# Altium PCB valdisPCB.PcbDoc
Units mm, origin at the board's own origin, x right, y up, seen from the top; angles counter-clockwise.
Board outline 59.82 x 60 mm, 2 copper layers (Top Layer, Bottom Layer); 80 components, 68 nets, 288 pads, 0 vias.
Unrouted connection lines stored in the file: 192.
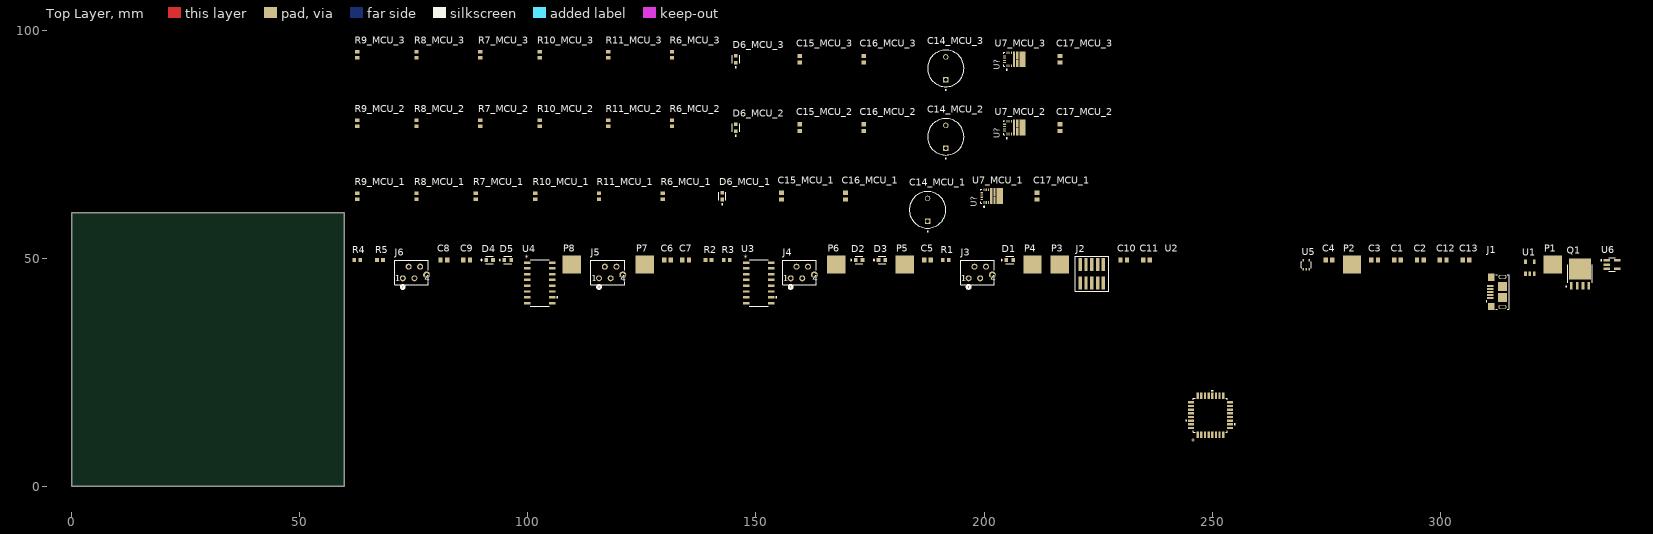
[diagram p0: Top Layer view]
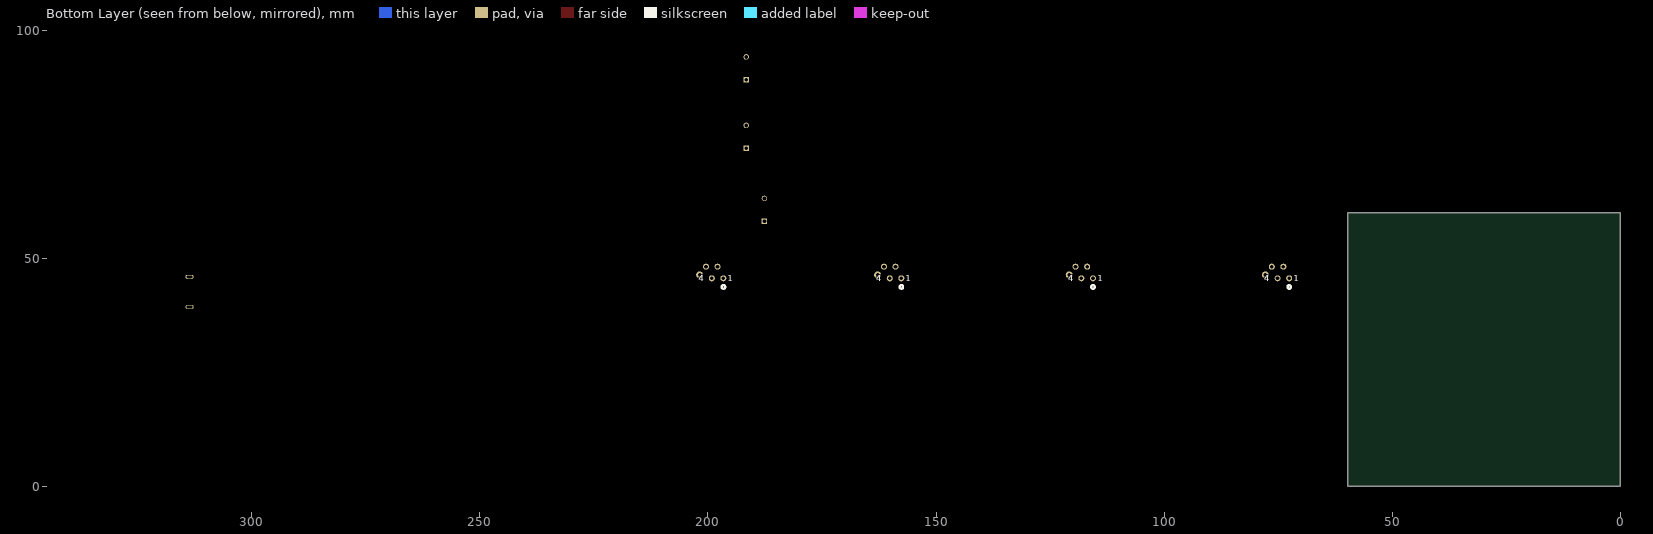
[diagram p1: Bottom Layer view, seen from below]

## Layer stack, top to bottom
Top Solder: solder mask 0.0102, Solder Resist, Dk 3.5
Top Layer: signal copper 0.0356
Dielectric 1: dielectric 0.32, FR-4, Dk 4.8
Bottom Layer: signal copper 0.0356
Bottom Solder: solder mask 0.0102, Solder Resist, Dk 3.5

## Board outline
0,0 59.817,0 59.817,60 0,60

## Design rules (kind name [scope] priority, off if disabled: settings)
Clearance [All] p1: gap=0.254 ignorepadtopadclearanceinfootprint=FALSE except(0: Arc-Hole Track-Hole SMDPad-Hole THPad-Hole Via-Hole Fill-Hole Poly-Hole Region-Hole Text-Hole)
PolygonConnect [All] p1: connectstyle=Relief reliefconductorwidth=0.254 reliefentries=4 polygonreliefangle="90 Angle" airgapwidth=0.254
RoomDefinition MCU_3 [InComponentClass('MCU_3')] p1: confinementstyle=ConfineIn formatcopy=TRUE lockcomponents=FALSE outline 61.6,85.6 229.6,85.6 229.6,99.6 61.6,99.6
RoomDefinition MCU_2 [InComponentClass('MCU_2')] p2: confinementstyle=ConfineIn formatcopy=TRUE lockcomponents=FALSE outline 61.6,70.6 229.6,70.6 229.6,84.6 61.6,84.6
RoomDefinition MCU_1 [InComponentClass('MCU_1')] p3: confinementstyle=ConfineIn formatcopy=TRUE lockcomponents=FALSE outline 61.6,54.6 223.6,54.6 223.6,68.6 61.6,68.6
RoomDefinition mainboard_valdis [InComponentClass('mainboard_valdis')] p4: confinementstyle=ConfineIn formatcopy=TRUE lockcomponents=FALSE outline 60.6,2.6 340.6,2.6 340.6,53.6 60.6,53.6
RoutingVias [All] p1: holewidth=0.711 width=1.27 viastyle="Through Hole" minholewidth=0.711 minwidth=1.27 maxholewidth=0.711 maxwidth=1.27
SolderMaskExpansion [All] p1: expansion=0.102 istentingtop=FALSE
Width [All] p1: maxlimit=0.254 minlimit=0.254 preferedwidth=0.254
30 further rules are at their usual default settings.

## Classes and differential pairs
channel class mcu_valdis: MCU_1 MCU_2 MCU_3
component class MCU_3: C14_MCU_3 C15_MCU_3 C16_MCU_3 C17_MCU_3 D6_MCU_3 R6_MCU_3 R7_MCU_3 R8_MCU_3 R9_MCU_3 R10_MCU_3 R11_MCU_3 U7_MCU_3
component class MCU_2: C14_MCU_2 C15_MCU_2 C16_MCU_2 C17_MCU_2 D6_MCU_2 R6_MCU_2 R7_MCU_2 R8_MCU_2 R9_MCU_2 R10_MCU_2 R11_MCU_2 U7_MCU_2
component class MCU_1: C14_MCU_1 C15_MCU_1 C16_MCU_1 C17_MCU_1 D6_MCU_1 R6_MCU_1 R7_MCU_1 R8_MCU_1 R9_MCU_1 R10_MCU_1 R11_MCU_1 U7_MCU_1
component class mainboard_valdis: C1 C2 C3 C4 C5 C6 C7 C8 C9 C10 C11 C12 C13 D1 D2 D3 D4 D5 J1 J2 J3 J4 J5 J6 P1 P2 P3 P4 P5 P6 P7 P8 Q1 R1 R2 R3 R4 R5 U1 U2 U3 U4 U5 U6

## Components (designator, comment, footprint, x,y, rotation, side; value= is the part's Value field where it differs from the comment)
C1 "4.7uF" CAPC1608X90X35ML10T15 290.6,49.6 r0 top
C2 "100nF" CAPC1608X90X35ML10T15 295.6,49.6 r0 top
C3 "100nF" CAPC1608X90X35ML10T15 285.6,49.6 r0 top
C4 "100nF" CAPC1608X90X35ML10T15 275.6,49.6 r0 top
C5 "100nF" CAPC1608X90X35ML10T15 187.6,49.6 r0 top
C6 "100nF" CAPC1608X90X35ML10T15 130.6,49.6 r0 top
C7 "100nF" CAPC1608X90X35ML10T15 134.6,49.6 r0 top
C8 "100nF" CAPC1608X90X35ML10T15 81.6,49.6 r0 top
C9 "100nF" CAPC1608X90X35ML10T15 86.6,49.6 r0 top
C10 "1uF" CAPC1608X90X35ML10T15 230.6,49.6 r0 top
C11 "1uF" CAPC1608X90X35ML10T15 235.6,49.6 r0 top
C12 "1uF" CAPC1608X90X35ML10T15 300.6,49.6 r0 top
C13 "1uF" CAPC1608X90X35ML10T15 305.6,49.6 r0 top
C14_MCU_1 "470uF" CAPPRD500W60D800H1500 187.6,60.6 r90 top (schematic designator C14)
C14_MCU_2 "470uF" CAPPRD500W60D800H1500 191.6,76.6 r90 top (schematic designator C14)
C14_MCU_3 "470uF" CAPPRD500W60D800H1500 191.6,91.6 r90 top (schematic designator C14)
C15_MCU_1 "4.7uF" CAPC1608X90X35ML10T15 155.6,63.6 r90 top (schematic designator C15)
C15_MCU_2 "4.7uF" CAPC1608X90X35ML10T15 159.6,78.6 r90 top (schematic designator C15)
C15_MCU_3 "4.7uF" CAPC1608X90X35ML10T15 159.6,93.6 r90 top (schematic designator C15)
C16_MCU_1 "100nF" CAPC1608X90X35ML10T15 169.6,63.6 r90 top (schematic designator C16)
C16_MCU_2 "100nF" CAPC1608X90X35ML10T15 173.6,78.6 r90 top (schematic designator C16)
C16_MCU_3 "100nF" CAPC1608X90X35ML10T15 173.6,93.6 r90 top (schematic designator C16)
C17_MCU_1 "100nF" CAPC1608X90X35ML10T15 211.6,63.6 r90 top (schematic designator C17)
C17_MCU_2 "100nF" CAPC1608X90X35ML10T15 216.6,78.6 r90 top (schematic designator C17)
C17_MCU_3 "100nF" CAPC1608X90X35ML10T15 216.6,93.6 r90 top (schematic designator C17)
D1 "LTST-C191TBKT" FP-LTST-C191TBKT-MFG 205.6,49.6 r0 top
D2 "LTST-C191TBKT" FP-LTST-C191TBKT-MFG 172.6,49.6 r0 top
D3 "LTST-C191TBKT" FP-LTST-C191TBKT-MFG 177.6,49.6 r0 top
D4 "LTST-C191TBKT" FP-LTST-C191TBKT-MFG 91.6,49.6 r0 top
D5 "LTST-C191TBKT" FP-LTST-C191TBKT-MFG 95.6,49.6 r0 top
D6_MCU_1 "LTST-C191TBKT" FP-LTST-C191TBKT-MFG 142.6,63.6 r90 top (schematic designator D6)
D6_MCU_2 "LTST-C191TBKT" FP-LTST-C191TBKT-MFG 145.6,78.6 r90 top (schematic designator D6)
D6_MCU_3 "LTST-C191TBKT" FP-LTST-C191TBKT-MFG 145.6,93.6 r90 top (schematic designator D6)
J1 "10118193-0001LF" FCI_10118193-0001LF 313.6,42.6 r90 top
J2 "FTSH-105-01-L-DV-K" FTSH-105-01-XXX-DV-K 223.6,46.6 r0 top
J3 "215079-4" CONN_215079-4_TYC 196.6,45.6 r0 top
J4 "215079-4" CONN_215079-4_TYC 157.6,45.6 r0 top
J5 "215079-4" CONN_215079-4_TYC 115.6,45.6 r0 top
J6 "215079-4" CONN_215079-4_TYC 72.6,45.6 r0 top
P1 "BAT+" PCBComponent_1 324.6,48.6 r0 top
P2 "BAT-" PCBComponent_1 280.6,48.6 r0 top
P3 "M1+" PCBComponent_1 216.6,48.6 r0 top
P4 "M1-" PCBComponent_1 210.6,48.6 r0 top
P5 "M2+" PCBComponent_1 182.6,48.6 r0 top
P6 "M2-" PCBComponent_1 167.6,48.6 r0 top
P7 "M3+" PCBComponent_1 125.6,48.6 r0 top
P8 "M3-" PCBComponent_1 109.6,48.6 r0 top
Q1 "BUK6Y10-30PX" TO127P600X120-5N 330.6,46.6 r0 top
R1 "1K" RESC1609X50X30NL8T20 191.6,49.6 r0 top
R2 "1K" RESC1609X50X30NL8T20 139.6,49.6 r0 top
R3 "1K" RESC1609X50X30NL8T20 143.6,49.6 r0 top
R4 "1K" RESC1609X50X30NL8T20 62.6,49.6 r0 top
R5 "1K" RESC1609X50X30NL8T20 67.6,49.6 r0 top
R6_MCU_1 "1K" RESC1609X50X30NL8T20 129.6,63.6 r90 top (schematic designator R6)
R6_MCU_2 "1K" RESC1609X50X30NL8T20 131.6,79.6 r90 top (schematic designator R6)
R6_MCU_3 "1K" RESC1609X50X30NL8T20 131.6,94.6 r90 top (schematic designator R6)
R7_MCU_1 "47K" RESC1609X50X30NL8T20 88.6,63.6 r90 top (schematic designator R7)
R7_MCU_2 "47K" RESC1609X50X30NL8T20 89.6,79.6 r90 top (schematic designator R7)
R7_MCU_3 "47K" RESC1609X50X30NL8T20 89.6,94.6 r90 top (schematic designator R7)
R8_MCU_1 "0" RESC1609X50X30NL8T20 75.6,63.6 r90 top (schematic designator R8)
R8_MCU_2 "0" RESC1609X50X30NL8T20 75.6,79.6 r90 top (schematic designator R8)
R8_MCU_3 "0" RESC1609X50X30NL8T20 75.6,94.6 r90 top (schematic designator R8)
R9_MCU_1 "0" RESC1609X50X30NL8T20 62.6,63.6 r90 top (schematic designator R9)
R9_MCU_2 "0" RESC1609X50X30NL8T20 62.6,79.6 r90 top (schematic designator R9)
R9_MCU_3 "0" RESC1609X50X30NL8T20 62.6,94.6 r90 top (schematic designator R9)
R10_MCU_1 "0" RESC1609X50X30NL8T20 101.6,63.6 r90 top (schematic designator R10)
R10_MCU_2 "0" RESC1609X50X30NL8T20 102.6,79.6 r90 top (schematic designator R10)
R10_MCU_3 "0" RESC1609X50X30NL8T20 102.6,94.6 r90 top (schematic designator R10)
R11_MCU_1 "2K" RESC1609X50X30NL8T20 115.6,63.6 r90 top (schematic designator R11)
R11_MCU_2 "2K" RESC1609X50X30NL8T20 117.6,79.6 r90 top (schematic designator R11)
R11_MCU_3 "2K" RESC1609X50X30NL8T20 117.6,94.6 r90 top (schematic designator R11)
U1 "CM1223" SOT23-5 319.6,46.6 r0 top
U2 "STM32G441KBT3" LQFP32_7X7_STM 249.6,15.6 r90 top
U3 "MAX14930DASE+" 21-0041_S16+1_MXM 150.6,44.6 r0 top
U4 "MAX14930DASE+" 21-0041_S16+1_MXM 102.6,44.6 r0 top
U5 "NCV8730ASN500T1G" TSSOP5 270.6,48.6 r0 top
U6 "NCP164CSN330T1G" SOP95P275X110-5N 337.6,48.6 r0 top
U7_MCU_1 "PDRV8243HRXYQ1" RXY0014A-MFG 201.6,63.6 r90 top (schematic designator U7)
U7_MCU_2 "PDRV8243HRXYQ1" RXY0014A-MFG 206.6,78.6 r90 top (schematic designator U7)
U7_MCU_3 "PDRV8243HRXYQ1" RXY0014A-MFG 206.6,93.6 r90 top (schematic designator U7)

## Footprints (in the part's own frame and the unit in brackets; to place one, negate y for a bottom-side part, rotate by r counter-clockwise, add the part's x,y. Pads: shape width x height; smd on the part's side, far side on the other; paste and mask are expansions set on the pad)
21-0041_S16+1_MXM [mm]
  rect 1.456x0.533 smd paste+0 mask+0: 1(-2.722,4.445) 2(-2.722,3.175) 3(-2.722,1.905) 4(-2.722,0.635) 5(-2.722,-0.635) 6(-2.722,-1.905) 7(-2.722,-3.175) 8(-2.722,-4.445) 9(2.722,-4.445) 10(2.722,-3.175) 11(2.722,-1.905) 12(2.722,-0.635) 13(2.722,0.635) 14(2.722,1.905) 15(2.722,3.175) 16(2.722,4.445)
  silkscreen extent -2.12,-5.08 3.96,5.08, body extent -3.1,-4.95 3.1,4.95, height 1.76
CAPC1608X90X35ML10T15 [mm] "Chip Capacitor, 2-Leads, Body 1.7x0.9mm, IPC Low Density"
  rect 0.95x1.05 smd: 1(-0.725,0) 2(0.725,0)
  body extent -0.85,-0.45 0.85,0.45, height 0.9
CAPPRD500W60D800H1500 [mm]
  round 1.2 hole 0.85: N(2.5,0)
  rect 1.2x1.2 hole 0.85: P(-2.5,0)
  silkscreen extent -4.85,-4 4,4, body extent -4,-4 4,4, height 15
CONN_215079-4_TYC [mil]
  round 52 hole 32: 1(0,0) 2(50,100) 3(100,0) 4(150,100)
  round 60 hole 30 unplated: 5(205,29)
  silkscreen extent -70,-90 220,155, body extent 0,0 10,10, height 10
FCI_10118193-0001LF [mm]
  rect 0.4x1.35 smd: 1(-1.3,2.675) 2(-0.65,2.675) 3(0,2.675) 4(0.65,2.675) 5(1.3,2.675)
  rect 1.6x1.4 smd: S1(-3.2,2.45) S2(3.2,2.45)
  rect 1.9x1.9 smd: S3(1.2,0) S4(-1.2,0)
  oval 0.9x1.8 hole 0.5 slot 1.2 at 90 deg: S5(-3.3,0) S6(3.3,0)
  silkscreen extent -3.8,-1.45 3.8,3.6
FP-LTST-C191TBKT-MFG [mm]
  rect 0.8x0.8 smd paste+0 mask+0: 1(-0.75,0) 2(0.75,0)
  silkscreen extent -1.87,-0.8 0.85,0.8, body extent -1.25,-0.55 1.25,0.55, height 0.25
FTSH-105-01-XXX-DV-K [mil]
  rect 29x110 smd mask+2: 1(-100,-80) 2(-100,80) 3(-50,-80) 4(-50,80) 5(0,-80) 6(0,80) 7(50,-80) 8(50,80) 9(100,-80) 10(100,80)
  silkscreen extent -145,-150 145,150
LQFP32_7X7_STM [mm]
  rect 1.359x0.501 smd paste+0 mask+0: 1(-4.274,2.8) 2(-4.274,2) 3(-4.274,1.2) 4(-4.274,0.4) 5(-4.274,-0.4) 6(-4.274,-1.2) 7(-4.274,-2) 8(-4.274,-2.8) 17(4.274,-2.8) 18(4.274,-2) 19(4.274,-1.2) 20(4.274,-0.4) 21(4.274,0.4) 22(4.274,1.2) 23(4.274,2) 24(4.274,2.8)
  rect 0.501x1.359 smd paste+0 mask+0: 9(-2.8,-4.274) 10(-2,-4.274) 11(-1.2,-4.274) 12(-0.4,-4.274) 13(0.4,-4.274) 14(1.2,-4.274) 15(2,-4.274) 16(2.8,-4.274) 25(2.8,4.274) 26(2,4.274) 27(1.2,4.274) 28(0.4,4.274) 29(-0.4,4.274) 30(-1.2,4.274) 31(-2,4.274) 32(-2.8,4.274)
  silkscreen extent -3.72,-5.46 5.46,5.46, body extent 0,0 0.25,0.25, height 0.25
PCBComponent_1 [mm]
  rect 4x4 smd: 1(0,0)
RESC1609X50X30NL8T20 [mm] "Chip Resistor, 2-Leads, Body 1.65x0.95mm, IPC Medium Density"
  rect 0.8x0.95 smd: 1(-0.65,0) 2(0.65,0)
  body extent -0.82,-0.48 0.82,0.48, height 0.5
RXY0014A-MFG [mm]
  rect 0.6x0.25 smd paste+0 mask-0.292: 1(-1.4,1.625) 2(-1.4,1.125) 3(-1.4,0.625) 8(1.4,0.625) 9(1.4,1.125) 10(1.4,1.625)
  rect 3.5x0.5 smd paste-1.737 mask-1.74: 4(0,0.05)
  rect 1.675x0.5 smd paste-0.825 mask-0.826: 5(-0.913,-0.65) 7(0.913,-0.65)
  rect 3.5x1.4 smd paste-1.737 mask-1.74: 6(0,-1.8)
  rect 0.25x0.6 smd paste+0 mask-0.292: 11(0.75,2.15) 12(0.25,2.15) 13(-0.25,2.15) 14(-0.75,2.15)
  silkscreen extent -2.45,1.5 1.55,2.3, body extent 0,0 0.25,0.25, height 0.25
SOP95P275X110-5N [mm]
  rect 1.42x0.58 smd: 1(-1.145,0.95) 2(-1.145,0) 3(-1.145,-0.95) 4(1.145,-0.95) 5(1.145,0.95)
  silkscreen extent -2.46,-1.5 0.75,1.5
SOT23-5 [mm] "SOT143-4 as used in SP0503BAHTG"
  round 0.4 on Top Overlay: 1(-1.7,0)
  rect 0.6x1 smd: 1(-0.95,0) 2(0,0) 3(0.95,0) 4(0.95,2.6) 5(-0.95,2.6)
  body extent -1.46,0.13 1.46,2.47, height 1
TO127P600X120-5N [mm]
  rect 0.6x1.62 smd: 1(-1.905,-2.65) 2(-0.635,-2.65) 3(0.635,-2.65) 4(1.905,-2.65)
  rect 4.8x4.58 smd paste-3: 5(0,1.06)
  silkscreen extent -3.1,-2.9 2.72,1.97
TSSOP5 [mm]
  rect 0.35x0.55 smd: 1(-0.65,-1.04) 2(0,-1.04) 3(0.65,-1.04) 4(0.65,0.95) 5(-0.65,0.94)
  silkscreen extent -1.1,-0.7 1.1,0.6

## Part data
C1 C2 C3 C4 C5 C6 C7 C8 C9 C10 C11 C12 C13 C15_MCU_1 C15_MCU_2 C15_MCU_3 C16_MCU_1 C16_MCU_2 C16_MCU_3 C17_MCU_1 C17_MCU_2 C17_MCU_3: library part CMP-2000-04945-1, "Chip Capacitor, 22 pF, +/- 5%, 50 V, -55 to 125 degC, 0603 (1608 Metric), RoHS, Tape and Reel", Capacitance=22pF, Case Size/Dimension=0603, Dielectric=C0G, Manufacturer=Murata, Package Description="2-Pin Surface Mount Device, Body 1.6 x 0.8 mm", Package Reference=603, Rated Voltage=50V, Tolerance (%)=±5%, Datasheet URL=https://datasheet.ciiva.com/11786/0900766b807a1cab-11786398.pdf, Datasheet Version=Jul-06, Manufacturer URL=http://www.murata.com/
C14_MCU_1 C14_MCU_2 C14_MCU_3: library part EEUFR1E471YB, "470F 25V Aluminum Electrolytic Capacitors Radial, Can 8000 Hrs @ 105C", Package="RADIAL-2 Panasonic", Availability="In Stock", Check_prices=https://www.snapeda.com/parts/EEUFR1E471YB/Panasonic/view-part/5797024/?ref=eda, MF=Panasonic, MP=EEUFR1E471YB, Price=None, SnapEDA_Link=https://www.snapeda.com/parts/EEUFR1E471YB/Panasonic/view-part/5797024/?ref=snap
D1 D2 D3 D4 D5 D6_MCU_1 D6_MCU_2 D6_MCU_3: library part CMP-22017-000008-1, "LED BLUE CLEAR CHIP SMD", Case Code (Imperial)=0603, Case Code (Metric)=1608, Color=Blue, Forward Current=20mA, Forward Voltage=3.8V, Lens Color=Colorless, Max Operating Temperature=80°C, Max Power Dissipation=75mW, Min Operating Temperature=-20°C, Package Quantity=1, Power Dissipation=76mW, Reverse Voltage=5V, Case/Package=0603, Depth=1.6mm, Dominant Wavelength=475nm, Height=0.55mm, Illumination Color=Blue, Lead Free="Lead Free", Length=0.8mm, Lens Style=Diffused, Lens Transparency=Clear, Luminous Intensity=180mcd, Mount="Surface Mount", Number of Elements=1, Number of LEDs=1, Number of Pins=2, Packaging="Tape and Reel", Radiation Hardening=No, Test Current=20mA, Viewing Angle=130°, Wavelength=468nm, Width=0.8mm
J1: "USB - micro B USB 2.0 Receptacle Connector 5 Position Surface Mount, Right Angle; Through Hole", Package=None, Availability=Unavailable, MF="Amphenol ICC", MP=10118193-0001LF, Price=None, SnapEDA_Link=https://www.snapeda.com/parts/10118193-0001LF/Amphenol%20FCI/view-part/2758989/?ref=snap
J3 J4 J5 J6: "No Description Available", Mfr_Name="TE Connectivity", Copyright="Copyright (C) 2022 Ultra Librarian. All rights reserved.", Manufacturer_Part_Number=215079-4, RefDes=RefDes, Type=DEV
P1 P2 P3 P4 P5 P6 P7 P8: library part Pad4x4
R1 R2 R3 R4 R5 R6_MCU_1 R6_MCU_2 R6_MCU_3 R7_MCU_1 R7_MCU_2 R7_MCU_3 R8_MCU_1 R8_MCU_2 R8_MCU_3 R9_MCU_1 R9_MCU_2 R9_MCU_3 R10_MCU_1 R10_MCU_2 R10_MCU_3 R11_MCU_1 R11_MCU_2 R11_MCU_3: library part CMP-2000-03816-5, "Chip Resistor, 0 Ohm, Jumper, 100 mW, -55 to 155 degC, 0603 (1608 Metric), RoHS, Tape and Reel", Manufacturer="Vishay Semiconductor", Max Operating Temperature="155 degC", Min Operating Temperature="-55 degC", Package Quantity=5000, Voltage Rating="75 V", ComponentLink1Description="Manufacturer URL", ComponentLink1URL=http://www.vishay.com/, ComponentLink2Description=Datasheet, ComponentLink2URL=http://www.vishay.com/docs/20035/dcrcwe3.pdf, DatasheetVersion=06/2012, Height="0.45 mm", Length="1.55 mm", Mount="Surface Mount", Mounting Technology="Surface Mount", PackageDescription="2-Pin Surface Mount Device, Body 1.575 x 0.85 mm", PackageReference=0603, Packaging="Tape and Reel", Pins=2, REACH SVHC=Unknown, RoHSCompliant=true
U2: "No Description Available", Built_By=EMA_Cory, Copyright="Copyright (C) 2018 Accelerated Designs. All rights reserved", Datasheet=https://www.st.com/resource/en/datasheet/stm32g441kb.pdf, Manufacturer_Part_Number=STM32G441KBT3, RefDes=RefDes, SourceLibrary=Add_to_database_2020-11-05, Type=DEV, Vendor=STMicroelectronics
U7_MCU_1 U7_MCU_2 U7_MCU_3: "No Description Available", Mfr_Name="Texas Instruments", Copyright="Copyright (C) 2022 Ultra Librarian. All rights reserved.", Manufacturer_Part_Number=PDRV8243HRXYQ1, RefDes=RefDes, Type=DEV

## Nets (pads, with @x,y where several pads share a name; then routed paths per layer and width w, separated by ;. In a path a pad name is that pad's centre, name@x,y a point inside that pad or via, vN(x,y) a via of type N, cw(c..) or ccw(c..) an arc to the next point about the centre after c; other vN are vias at no path point)
+3.3V: C6.2 C8.2 C13.2 D2.2 J2.1 J3.2 J4.2 J5.2 U3.1 U4.1 U6.5
+5_MCU_1: C7.2 C9.2 C11.2 C17_MCU_1.2 C17_MCU_2.2 C17_MCU_3.2 D5.2 R6_MCU_1.2 R6_MCU_2.2 R6_MCU_3.2 U3.16 U4.16 U5.5
+5VA: C12.2 D4.2 J1.1 U1.5 U6.1 U6.3
+16V: C10.2 C14_MCU_1.P C14_MCU_2.P C14_MCU_3.P C15_MCU_1.2 C15_MCU_2.2 C15_MCU_3.2 C16_MCU_1.2 C16_MCU_2.2 C16_MCU_3.2 D3.2 Q1.3 U5.1 U5.3 U7_MCU_1.4 U7_MCU_2.4 U7_MCU_3.4
GND: C1.1 C2.1 C3.1 C4.1 C5.1 C6.1 C8.1 C12.1 C13.1 J1.5 J1.S1 J1.S2 J1.S3 J1.S4 J1.S5 J1.S6 J2.3 J2.5 J2.9 R1.1 R2.1 R4.1 U1.2 U2.14 U2.16 U2.32 U3.2 U3.8 U4.2 U4.8 U6.2
GNDB: C7.1 C9.1 C10.1 C11.1 C14_MCU_1.N C14_MCU_2.N C14_MCU_3.N C15_MCU_1.1 C15_MCU_2.1 C15_MCU_3.1 C16_MCU_1.1 C16_MCU_2.1 C16_MCU_3.1 C17_MCU_1.1 C17_MCU_2.1 C17_MCU_3.1 J3.1 J4.1 J5.1 J6.1 R3.1 R5.1 R7_MCU_1.1 R7_MCU_2.1 R7_MCU_3.1 R8_MCU_1.1 R8_MCU_2.1 R8_MCU_3.1 R9_MCU_1.1 R9_MCU_2.1 R9_MCU_3.1 R10_MCU_1.1 R10_MCU_2.1 R10_MCU_3.1 R11_MCU_1.1 R11_MCU_2.1 R11_MCU_3.1 U3.9 U3.15 U4.9 U4.15 U5.2 U7_MCU_1.6 U7_MCU_1.8 U7_MCU_2.6 U7_MCU_2.8 U7_MCU_3.6 U7_MCU_3.8
M1_DIR_A: U3.14 U7_MCU_1.9
M1_DIR_B: U3.13 U7_MCU_1.10
M1_ENC_A: J3.3 U2.18
M1_ENC_B: J3.4 U2.19
M1_PWM_A: U2.5 U3.3
M1_PWM_B: U2.10 U3.4
M2_DIR_A: U3.12 U7_MCU_2.9
M2_DIR_B: U3.11 U7_MCU_2.10
M2_ENC_A: J4.3 U2.27
M2_ENC_B: J4.4 U2.28
M2_PWM_A: U2.6 U3.5
M2_PWM_B: U2.11 U3.6
M3_DIR_A: U4.14 U7_MCU_3.9
M3_DIR_B: U4.13 U7_MCU_3.10
M3_ENC_A: J5.3 U2.30
M3_ENC_B: J5.4 U2.29
M3_PWM_A: U2.7 U4.3
M3_PWM_B: U2.12 U4.4
NetC1_2: C1.2 C2.2 C3.2 C4.2 U2.1 U2.15 U2.17
NetD1_1: D1.1 R1.2
NetD1_2: D1.2 U2.2
NetD2_1: D2.1 R2.2
NetD3_1: D3.1 R3.2
NetD4_1: D4.1 R4.2
NetD5_1: D5.1 R5.2
NetD6_MCU_1_1: D6_MCU_1.1 U7_MCU_1.1
NetD6_MCU_1_2: D6_MCU_1.2 R6_MCU_1.1
NetD6_MCU_2_1: D6_MCU_2.1 U7_MCU_2.1
NetD6_MCU_2_2: D6_MCU_2.2 R6_MCU_2.1
NetD6_MCU_3_1: D6_MCU_3.1 U7_MCU_3.1
NetD6_MCU_3_2: D6_MCU_3.2 R6_MCU_3.1
NetP1_1: P1.1 Q1.1
NetP2_1: P2.1 Q1.2
NetP3_1: P3.1 U7_MCU_1.5
NetP4_1: P4.1 U7_MCU_1.7
NetP5_1: P5.1 U7_MCU_2.5
NetP6_1: P6.1 U7_MCU_2.7
NetP7_1: P7.1 U7_MCU_3.5
NetP8_1: P8.1 U7_MCU_3.7
NetR7_MCU_1_2: R7_MCU_1.2 U7_MCU_1.13
NetR7_MCU_2_2: R7_MCU_2.2 U7_MCU_2.13
NetR7_MCU_3_2: R7_MCU_3.2 U7_MCU_3.13
NetR8_MCU_1_2: R8_MCU_1.2 U7_MCU_1.12
NetR8_MCU_2_2: R8_MCU_2.2 U7_MCU_2.12
NetR8_MCU_3_2: R8_MCU_3.2 U7_MCU_3.12
NetR9_MCU_1_2: R9_MCU_1.2 U7_MCU_1.11
NetR9_MCU_2_2: R9_MCU_2.2 U7_MCU_2.11
NetR9_MCU_3_2: R9_MCU_3.2 U7_MCU_3.11
NetR10_MCU_1_2: R10_MCU_1.2 U7_MCU_1.14
NetR10_MCU_2_2: R10_MCU_2.2 U7_MCU_2.14
NetR10_MCU_3_2: R10_MCU_3.2 U7_MCU_3.14
NetR11_MCU_1_2: R11_MCU_1.2 U7_MCU_1.2
NetR11_MCU_2_2: R11_MCU_2.2 U7_MCU_2.2
NetR11_MCU_3_2: R11_MCU_3.2 U7_MCU_3.2
NRST: C5.2 J2.10 U2.4
SLEEP_n: U2.26 U4.5
SLEEP_nB: U4.12 U7_MCU_1.3 U7_MCU_2.3 U7_MCU_3.3
SWCLK: J2.4 U2.24
SWDIO: J2.2 U2.23
TRW_ENC: J6.2 U2.8
USB+: J1.3 U1.3 U2.22
USB-: J1.2 U1.4 U2.21
pads on no net: J1.4 J2.6 J2.7 J2.8 J3.5 J4.5 J5.5 J6.3 J6.4 J6.5 Q1.4 Q1.5 U1.1 U2.3 U2.9 U2.13 U2.20 U2.25 U2.31 U3.7 U3.10 U4.6 U4.7 U4.10 U4.11 U5.4 U6.4

## Text inside footprints (layer, text, board x,y; h text height)
J1: Mechanical 13 "PCB END" at 314.9,47.35 h0.41 r90
J3: Top Overlay "4" at 201.413,44.965 h1.27; Top Overlay "4" at 201.413,44.965 h1.27; Top Overlay "1" at 194.962,44.965 h1.27; Top Overlay "1" at 194.962,44.965 h1.27; Mechanical 13 "4" at 201.413,44.965 h1.27; Mechanical 13 "4" at 201.413,44.965 h1.27; Mechanical 13 "1" at 194.962,44.965 h1.27; Mechanical 13 "1" at 194.962,44.965 h1.27; Bottom Overlay "4" at 202.048,44.965 h1.27; Bottom Overlay "4" at 202.048,44.965 h1.27; Bottom Overlay "1" at 195.597,44.965 h1.27; Bottom Overlay "1" at 195.597,44.965 h1.27
J4: Top Overlay "4" at 162.413,44.965 h1.27; Top Overlay "4" at 162.413,44.965 h1.27; Top Overlay "1" at 155.962,44.965 h1.27; Top Overlay "1" at 155.962,44.965 h1.27; Mechanical 13 "4" at 162.413,44.965 h1.27; Mechanical 13 "4" at 162.413,44.965 h1.27; Mechanical 13 "1" at 155.962,44.965 h1.27; Mechanical 13 "1" at 155.962,44.965 h1.27; Bottom Overlay "4" at 163.048,44.965 h1.27; Bottom Overlay "4" at 163.048,44.965 h1.27; Bottom Overlay "1" at 156.597,44.965 h1.27; Bottom Overlay "1" at 156.597,44.965 h1.27
J5: Top Overlay "4" at 120.413,44.965 h1.27; Top Overlay "4" at 120.413,44.965 h1.27; Top Overlay "1" at 113.962,44.965 h1.27; Top Overlay "1" at 113.962,44.965 h1.27; Mechanical 13 "4" at 120.413,44.965 h1.27; Mechanical 13 "4" at 120.413,44.965 h1.27; Mechanical 13 "1" at 113.962,44.965 h1.27; Mechanical 13 "1" at 113.962,44.965 h1.27; Bottom Overlay "4" at 121.048,44.965 h1.27; Bottom Overlay "4" at 121.048,44.965 h1.27; Bottom Overlay "1" at 114.597,44.965 h1.27; Bottom Overlay "1" at 114.597,44.965 h1.27
J6: Top Overlay "4" at 77.413,44.965 h1.27; Top Overlay "4" at 77.413,44.965 h1.27; Top Overlay "1" at 70.962,44.965 h1.27; Top Overlay "1" at 70.962,44.965 h1.27; Mechanical 13 "4" at 77.413,44.965 h1.27; Mechanical 13 "4" at 77.413,44.965 h1.27; Mechanical 13 "1" at 70.962,44.965 h1.27; Mechanical 13 "1" at 70.962,44.965 h1.27; Bottom Overlay "4" at 78.048,44.965 h1.27; Bottom Overlay "4" at 78.048,44.965 h1.27; Bottom Overlay "1" at 71.597,44.965 h1.27; Bottom Overlay "1" at 71.597,44.965 h1.27
U2: Top Overlay "*" at 246.654,9.695 h1.27 r90; Mechanical 13 "*" at 247.035,12.069 h1.27 r90; Mechanical 7 "0.362in/9.195mm" at 249.918,25.208 h0.64 r90; Mechanical 7 "0.283in/7.188mm" at 249.918,3.135 h0.64 r90; Mechanical 7 "0.283in/7.188mm" at 257.938,13.219 h0.64 r90; Mechanical 7 "0.362in/9.195mm" at 239.993,13.219 h0.64 r90; Mechanical 7 "0.03in/0.762mm" at 241.898,17.594 h0.64 r90; Mechanical 7 "0.031in/0.8mm" at 247.518,23.303 h0.64 r90; Mechanical 7 "Alt 2 Padstyle: OX90Y60D30P" at 268.225,7.028 h1.27 r90; Mechanical 7 "Alt 1 Padstyle: OX60Y90D30P" at 266.701,7.028 h1.27 r90; Mechanical 7 "Default Vert Padstyle: RX19p72Y53p5D0T" at 262.129,3.535 h1.27 r90; Mechanical 7 "Default Horiz Padstyle: RX19p72Y53p5D0T" at 260.605,3.218 h1.27 r90
U3: Top Overlay "*" at 147.307,49.451 h1.27; Mechanical 13 "*" at 148.67,48.207 h1.27
U4: Top Overlay "*" at 99.307,49.451 h1.27; Mechanical 13 "*" at 100.67,48.207 h1.27
U7_MCU_1: Top Overlay "U?" at 198.425,61.291 h1.27 r90
U7_MCU_2: Top Overlay "U?" at 203.425,76.291 h1.27 r90
U7_MCU_3: Top Overlay "U?" at 203.425,91.291 h1.27 r90